# Altium PCB PCB1.PcbDoc
Units mil, origin at the board's own origin, x right, y up, seen from the top; angles counter-clockwise.
Board outline 6000 x 4000 mil, 2 copper layers (Top Layer, Bottom Layer); 20 components, 14 nets, 51 pads, 0 vias.
Unrouted connection lines stored in the file: 34.
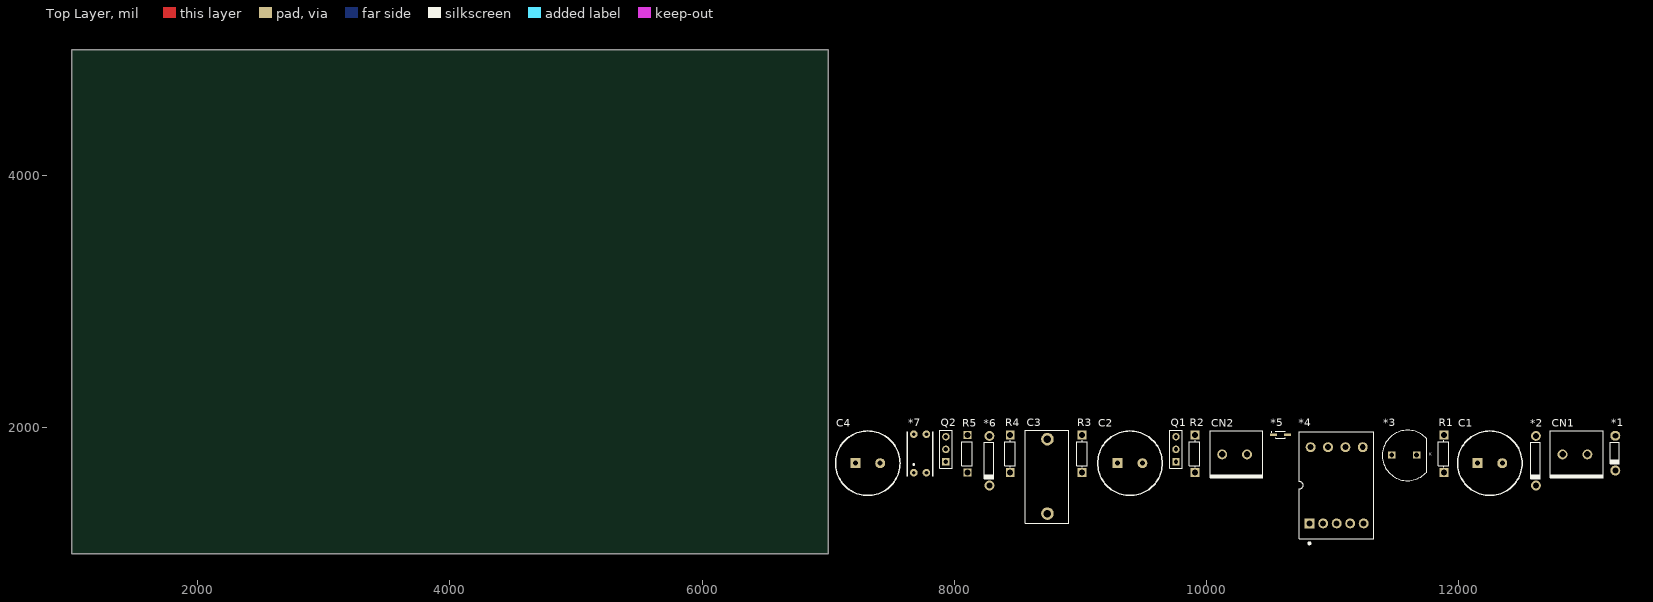
[diagram p0: Top Layer view]
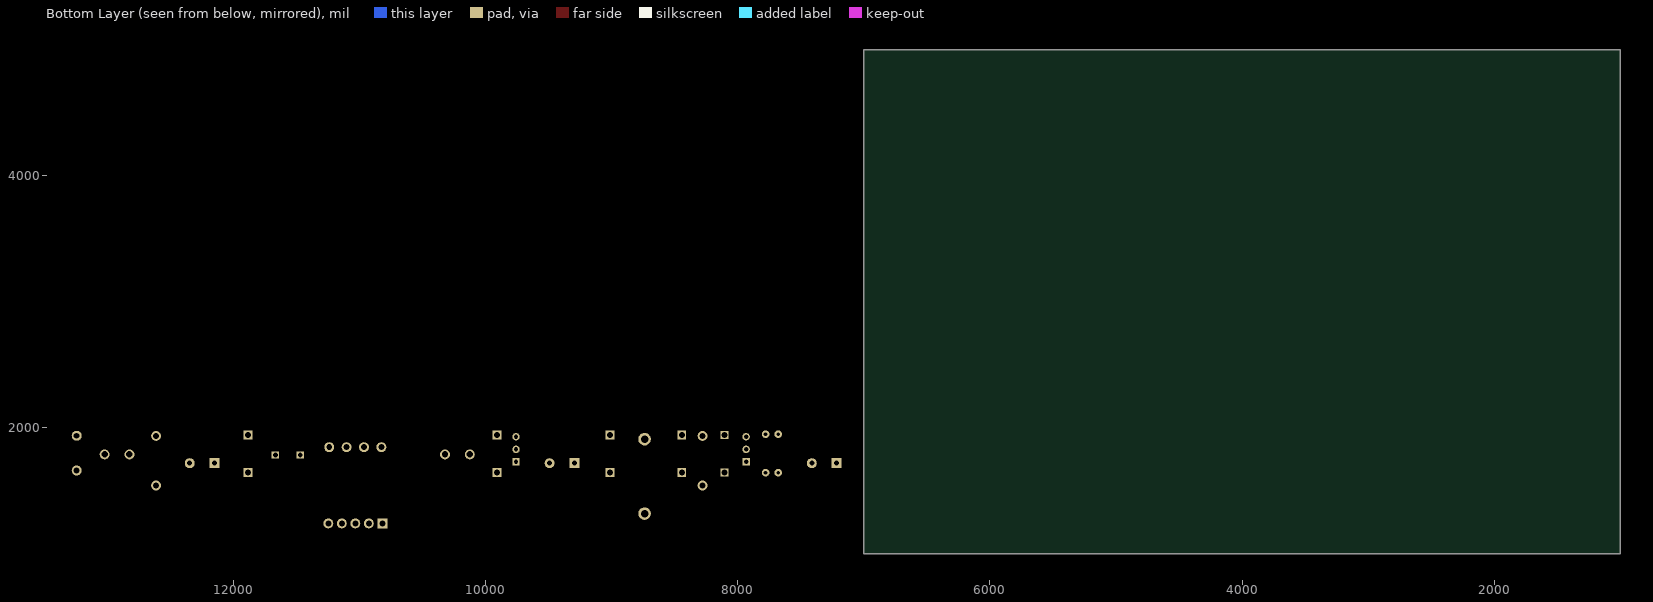
[diagram p1: Bottom Layer view, seen from below]

## Layer stack, top to bottom
Top Solder: solder mask 0.4, Solder Resist, Dk 3.5
Top Layer: signal copper 1.4
Dielectric 1: dielectric 12.6, FR-4, Dk 4.8
Bottom Layer: signal copper 1.4
Bottom Solder: solder mask 0.4, Solder Resist, Dk 3.5

## Board outline
1000,1000 7000,1000 7000,5000 1000,5000

## Design rules (kind name [scope] priority, off if disabled: settings)
Clearance [All] p1: gap=10 ignorepadtopadclearanceinfootprint=FALSE except(0: Arc-Hole Track-Hole SMDPad-Hole THPad-Hole Via-Hole Fill-Hole Poly-Hole Region-Hole Text-Hole)
PolygonConnect [All] p1: connectstyle=Relief reliefconductorwidth=10 reliefentries=4 polygonreliefangle="90 Angle" airgapwidth=10
RoomDefinition Sheet1 [InComponentClass('Sheet1')] p1: confinementstyle=ConfineIn formatcopy=TRUE lockcomponents=FALSE outline 7045,1060 13310,1060 13310,2090 7045,2090
RoutingVias [All] p1: holewidth=28 width=50 viastyle="Through Hole" minholewidth=28 minwidth=50 maxholewidth=28 maxwidth=50
SolderMaskExpansion [All] p1: expansion=4
Width [All] p1: maxlimit=10 minlimit=10 preferedwidth=10
30 further rules are at their usual default settings.

## Components (designator, comment, footprint, x,y, rotation, side; value= is the part's Value field where it differs from the comment)
*1 "DIO_ZENER_DO35" DIO_PTH_DO35 13245,1800 r90 top value=12V
*2 "DIO_PTH_1N4007" DIO_PTH_DO41 12615,1740 r90 top value=?
*3 "LED_AXIAL_5MM" LED_Axial_5mm 11570,1785 r0 top value=?
*4 "Tranformer PLC" "DIV_TRAFO PLC" 11035,1545 r90 top
*5 "DIO_SMD_1N4148" DIO_SMD_SOD323 10590,1945 r0 top value=?
*6 "DIO_PTH_1N4007" DIO_PTH_DO41 8280,1740 r90 top value=?
*7 "CI_Optocoupler" SFH6106 7680,1645 r90 top
C1 "Electrolytic Capacitor" CAP_ALU_RADIAL_5MM 12250,1720 r0 top value=100uF
C2 "Electrolytic Capacitor" CAP_ALU_RADIAL_5MM 9395,1720 r0 top value=22uF
C3 "CAP_POL_RADIAL_16MM" CAP_POL_RADIAL_16MM 8740,1320 r90 top value=4.7nF
C4 "10uF" CAP_ALU_RADIAL_5MM 7315,1720 r0 top value=?F
CN1 "saida" CN_KRE_2 12925,1790 r0 top value=?
CN2 "?" CN_KRE_2 10225,1790 r0 top
Q1 "NPN_BC817" HEADER_1X3 9710,1830 r90 top
Q2 "NPN_BC817" HEADER_1X3 7885,1830 r90 top
R1 "330" RES_PTH_7.62MM 11885,1795 r90 top
R2 "1.6M" RES_PTH_7.62MM 9910,1795 r90 top
R3 "1k" RES_PTH_7.62MM 9015,1795 r90 top
R4 "?" RES_PTH_7.62MM 8445,1795 r90 top
R5 "*" RES-7.62mm 8105,1795 r90 top

## Footprints (in the part's own frame and the unit in brackets; to place one, negate y for a bottom-side part, rotate by r counter-clockwise, add the part's x,y. Pads: shape width x height; smd on the part's side, far side on the other; paste and mask are expansions set on the pad)
CAP_ALU_RADIAL_5MM [mm]
  rect 2x2 hole 1: 1(-2.5,0)
  round 2 hole 1: 2(2.5,0)
  silkscreen extent -6.5,-6.5 6.5,6.5, body extent -6.19,-6.18 6.29,6.32, height 20
CAP_POL_RADIAL_16MM [mm] "16 mm Pitch"
  round 2.54 hole 1.5: 1(0,0) 2(15,0)
  silkscreen extent -1.93,-4.34 16.84,4.42, body extent -1.78,-4.25 16.72,4.25, height 16.5
CN_KRE_2 [mm]
  round 2 hole 1.3: 1(-2.5,0) 2(2.5,0)
  silkscreen extent -4.93,-4.75 5.69,4.8, body extent -4.93,-4.7 5.64,4.8, height 15
DIO_PTH_DO35 [mm]
  round 2 hole 1.2: A(3.5,0) K(-3.5,0)
  silkscreen extent -2.12,-0.86 2.21,1.07, body extent -4.11,-0.86 4.07,1.06, height 1.96
DIO_PTH_DO41 [mm]
  round 2 hole 1.2: A(5,0) K(-5,0)
  silkscreen extent -3.62,-0.86 3.69,1.02, body extent -5.65,-1.36 5.71,1.36, height 1.36
DIO_SMD_SOD323 [mm] "Molded Diode, 2-Leads, Body 1.70x1.25mm, IPC Medium Density"
  rect 1.4x0.55 smd: A(1.4,0) K(-1.4,0)
  silkscreen extent -1.87,-0.7 0.95,0.7, body extent -1.25,-0.68 1.25,0.68, height 1
"DIV_TRAFO PLC" [mm] "PLC TRANSFORMER EE13 THT TI"
  rect 2x2 hole 1.2: 1(-7.675,5.44)
  round 2 hole 1.2: 2(-7.675,2.72) 3(-7.675,0) 4(-7.675,-2.72) 5(-7.675,-5.44) 6(7.675,-5.25) 7(7.675,-1.75) 8(7.675,1.75) 9(7.675,5.25)
  silkscreen extent -11.9,-7.5 10.75,7.5, body extent -9.75,-6.5 9.75,6.5, height 10.35
HEADER_1X3 [mm] "Connector; Header; 3x2 Position"
  rect 1.5x1.5 hole 0.9: 1(-2.54,-1.27)
  round 1.5 hole 0.9: 2(0,-1.27) 3(2.54,-1.27)
  silkscreen extent -3.81,-2.54 3.81,0, body extent -3.81,-2.54 3.81,0, height 9.5
LED_Axial_5mm [mm]
  rect 1.5x1.5 hole 1: A(-2.5,0) K(2.5,0)
  silkscreen extent -4.39,-5.17 4.51,4.99, body extent -2.84,-3.07 2.86,2.92, height 21.86
RES-7.62mm [mm]
  rect 1.6x1.6 hole 1.2: 1(-3.81,0) 2(3.81,0)
  silkscreen extent -2.43,-1.01 2.38,1.09, body extent -4.06,-1.15 4.16,1.25, height 3.2
RES_PTH_7.62MM [mm]
  rect 1.8x1.8 hole 1.2: 1(-3.81,0) 2(3.81,0)
  silkscreen extent -2.76,-1.01 2.76,1.09, body extent -4.06,-1.15 4.16,1.25, height 3.2
SFH6106 [mil] "TNY optocoupler"
  round 60 hole 30: 1(0,0) 2(0,-100) 3(304.96,-100) 4(304.96,0)
  silkscreen extent -30,-150 325,50, body extent -5,-140 305,40, height 169

## Part data
*4: Supplier Part Number 1=1297-1074-ND, Supplier 1=Digi-Key
C1 C2 C4: library part CAP_ALU_RADIAL_5MM, "PTH Radial Electrolytic Capacitor"
  C1 C4: Tensгo=?
  C2: Tensгo=400V
C3: "PTH Radial Polyester Capacitor", Tensгo=?
CN1 CN2: library part CN_MKDS_2, "MKDS_2"
R1 R2 R3 R4: library part RES_PTH_7.62MM, "Pin Through Hole Resistor 7.62mm"
R5: library part RES_PTH300, "Pin Through Hole Resistor 300mils/7.62mm"

## Nets (pads, with @x,y where several pads share a name; then routed paths per layer and width w, separated by ;. In a path a pad name is that pad's centre, name@x,y a point inside that pad or via, vN(x,y) a via of type N, cw(c..) or ccw(c..) an arc to the next point about the centre after c; other vN are vias at no path point)
GND: *3.K *4.3 *6.A *7.2 C1.2 C2.2 C4.2 CN1.2 CN2.2 Q2.2 R5.2
I8: *4.8 *7.3 C4.1
Net*1_K: *1.K *2.K C1.1 CN1.1 R1.2
Net*2_A: *2.A *4.1
Net*3_A: *3.A R1.1
Net*4_2: *4.2 *5.K C2.1 R2.1
Net*4_4: *4.4 Q1.3
Net*4_7: *4.7 *6.K C3.2
Net*5_A: *5.A CN2.1
Net*7_4: *7.4 Q2.1 R3.1
NetC3_1: C3.1 R4.2
NetQ1_1: Q1.1 Q2.3 R2.2 R4.1
NetQ1_2: Q1.2 R3.2 R5.1
Octo: *1.A *7.1
pads on no net: *4.5 *4.6 *4.9

## Text inside footprints (layer, text, board x,y; h text height)
*3: Top Overlay "K" at 11767.64,1770.83 h39.37